# Altium PCB SNES TST Adapter Type B.PcbDoc
Units mm, origin at the board's own origin, x right, y up, seen from the top; angles counter-clockwise.
Board outline 18.8 x 25 mm, 4 copper layers (Top Layer, Signal Layer 1, Signal Layer 2, Bottom Layer), stack 1.62 mm thick; 4 components, 68 nets, 280 pads, 151 vias.
Unrouted connection lines stored in the file: 3.
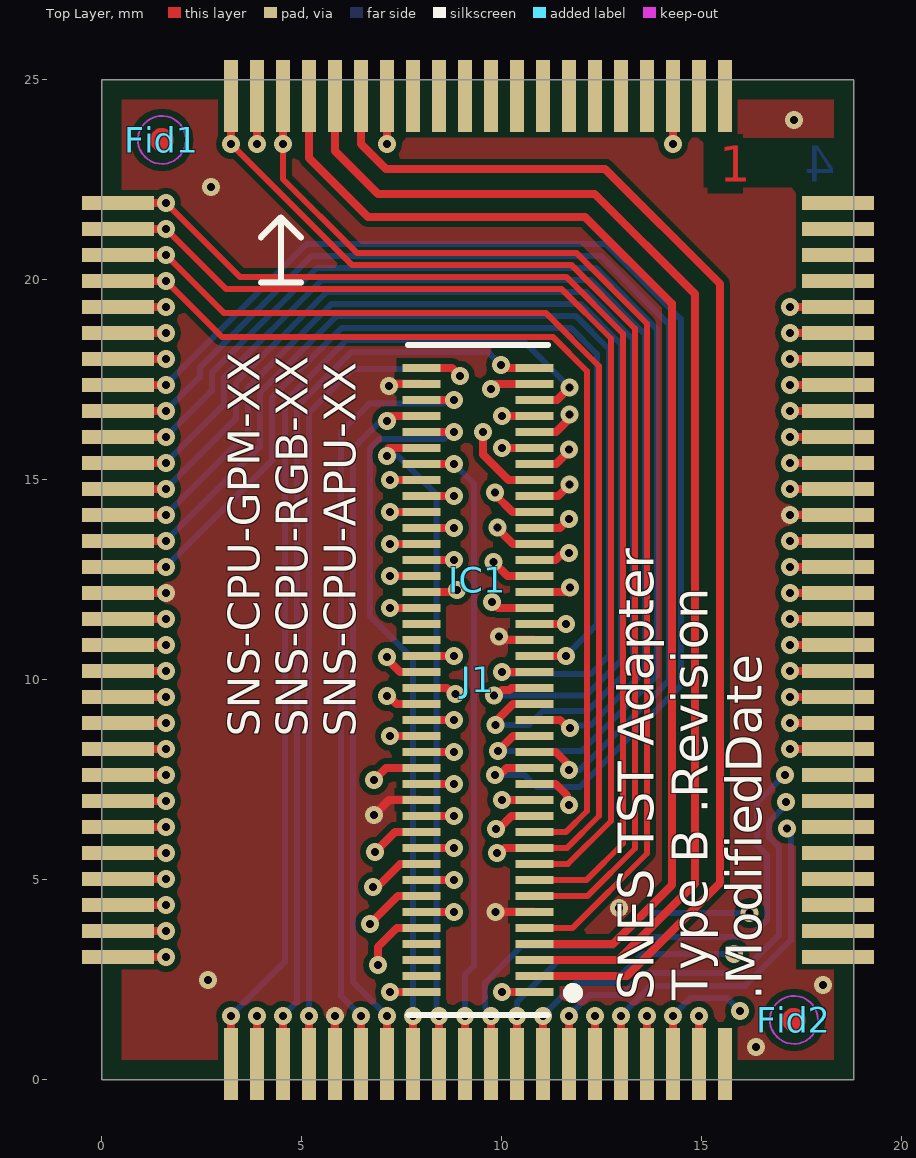
[diagram p0: Top Layer view]
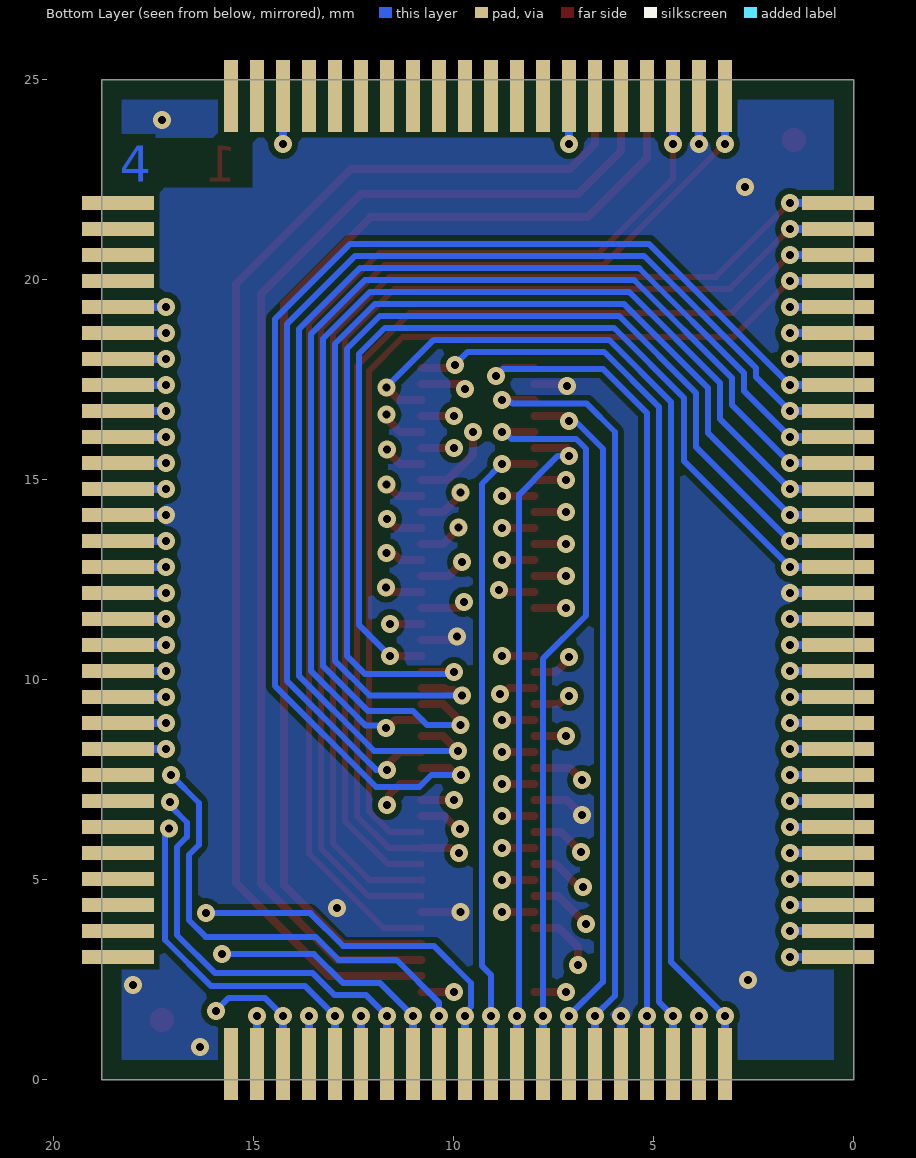
[diagram p1: Bottom Layer view, seen from below]
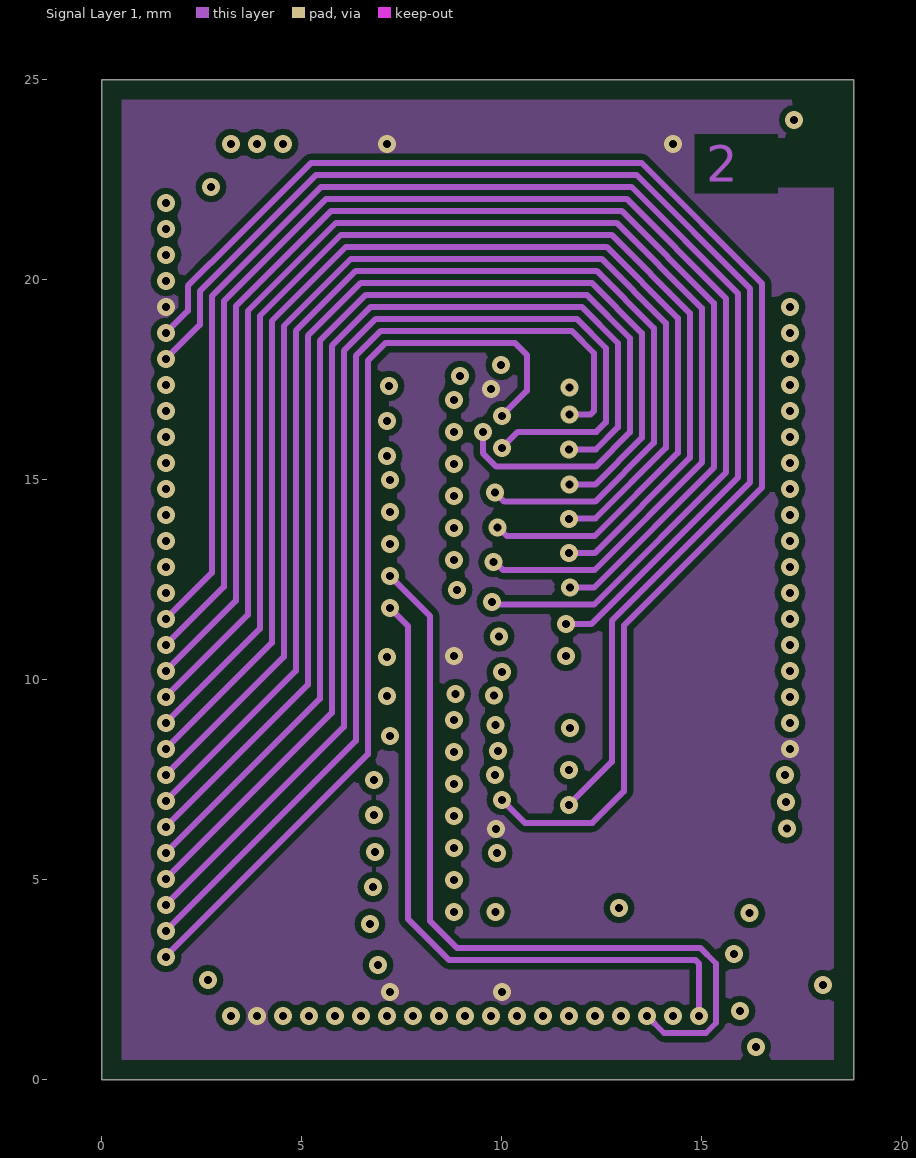
[diagram p2: Signal Layer 1]
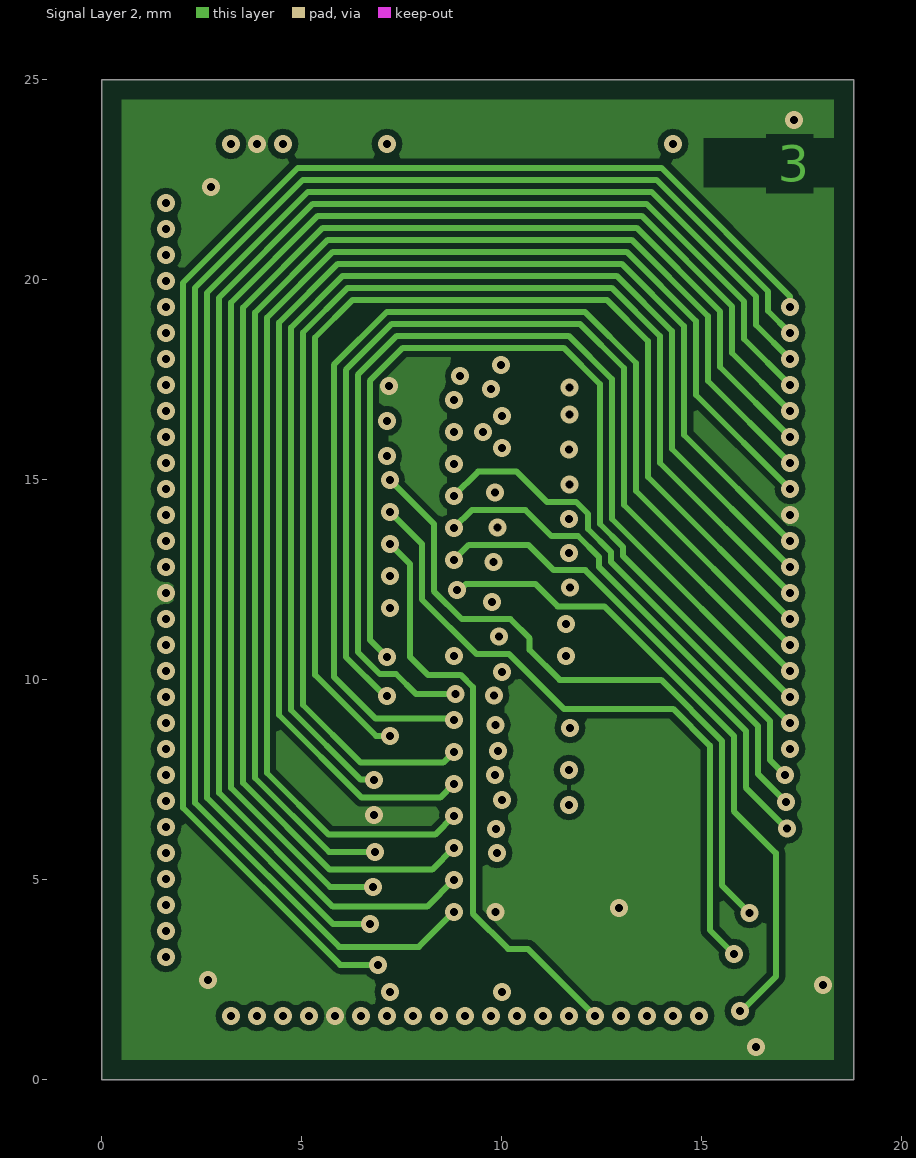
[diagram p3: Signal Layer 2]

## Layer stack, top to bottom
Top Solder: solder mask 0.01, Solder Resist, Dk 3.5
Top Layer: signal copper 0.035
Dielectric 2: prepreg 0.07, 1080, Dk 4.6
Dielectric 4: prepreg 0.07, 1080, Dk 4.6
Signal Layer 1: signal copper 0.035
Dielectric 1: core 1.2, FR-4, Dk 4.8
Signal Layer 2: signal copper 0.035
Dielectric 5: prepreg 0.07, 1080, Dk 4.6
Dielectric 3: prepreg 0.07, 1080, Dk 4.6
Bottom Layer: signal copper 0.035
Bottom Solder: solder mask 0.01, Solder Resist, Dk 3.5

## Board outline
0,0 18.8,0 18.8,25 0,25

## Design rules (kind name [scope] priority, off if disabled: settings)
BoardOutlineClearance [All] p1: gap=0 ignorepadtopadclearanceinfootprint=FALSE except(0.25: Track-OutlineEdge Track-CavityEdge Track-CutoutEdge Track-SplitBarrior; 0.3: Poly-OutlineEdge Poly-CavityEdge Poly-CutoutEdge Poly-SplitBarrior)
Clearance [All] p1: gap=0.15 ignorepadtopadclearanceinfootprint=FALSE except(0: Arc-Hole Track-Hole SMDPad-Hole THPad-Hole Via-Hole Fill-Hole Poly-Hole Region-Hole Text-Hole; 0.127: Arc-Via Track-Via)
MinimumSolderMaskSliver [All] p1: minsoldermaskwidth=0.099
PolygonConnect PolygonConnect_Via [isVia] p1: connectstyle=Direct reliefconductorwidth=0.254 reliefentries=4 polygonreliefangle="90 Angle" airgapwidth=0.254
PolygonConnect [All] p2: connectstyle=Relief reliefconductorwidth=0.2 reliefentries=4 polygonreliefangle="90 Angle" airgapwidth=0.2
RoutingVias [All] p1: holewidth=0.711 width=1.27 viastyle="Through Hole" minholewidth=0.2 minwidth=0.35 maxholewidth=0.711 maxwidth=1.27
SilkToSilkClearance [All] p1: silktosilkclearance=0.1
SilkToSolderMaskClearance [IsPad] p1: minsilkscreentomaskgap=0.1 clearancetoexposedcopper=TRUE
SolderMaskExpansion [All] p1: expansion=0.05 istentingtop=FALSE
UnRoutedNet [Not InNet('5V_S')] p1 off:
Width [All] p1: maxlimit=0.75 minlimit=0.15 preferedwidth=0.2
26 further rules are at their usual default settings.

## Components (designator, comment, footprint, x,y, rotation, side; value= is the part's Value field where it differs from the comment)
Fid1 "Fiducial" Fiducial_1_side 1.5,23.5 r90 top
Fid2 "Fiducial" Fiducial_1_side 17.3,1.5 r270 top
IC1 "PPU2100Pin" PPU100Pin_Double 9.4,12.5 r0 top locked
J1 "DF40C-80DS-0.4V(51)" DF40C-80DS 9.4,10 r90 top locked

## Footprints (in the part's own frame and the unit in brackets; to place one, negate y for a bottom-side part, rotate by r counter-clockwise, add the part's x,y. Pads: shape width x height; smd on the part's side, far side on the other; paste and mask are expansions set on the pad)
DF40C-80DS [mm]
  rect 0.2x0.95 smd: 1(-7.8,-1.415) 2(-7.8,1.415) 3(-7.4,-1.415) 4(-7.4,1.415) 5(-7,-1.415) 6(-7,1.415) 7(-6.6,-1.415) 8(-6.6,1.415) 9(-6.2,-1.415) 10(-6.2,1.415) 11(-5.8,-1.415) 12(-5.8,1.415) 13(-5.4,-1.415) 14(-5.4,1.415) 15(-5,-1.415) 16(-5,1.415) 17(-4.6,-1.415) 18(-4.6,1.415) 19(-4.2,-1.415) 20(-4.2,1.415) 21(-3.8,-1.415) 22(-3.8,1.415) 23(-3.4,-1.415) 24(-3.4,1.415) 25(-3,-1.415) 26(-3,1.415) 27(-2.6,-1.415) 28(-2.6,1.415) 29(-2.2,-1.415) 30(-2.2,1.415) 31(-1.8,-1.415) 32(-1.8,1.415) 33(-1.4,-1.415) 34(-1.4,1.415) 35(-1,-1.415) 36(-1,1.415) 37(-0.6,-1.415) 38(-0.6,1.415) 39(-0.2,-1.415) 40(-0.2,1.415) 41(0.2,-1.415) 42(0.2,1.415) 43(0.6,-1.415) 44(0.6,1.415) 45(1,-1.415) 46(1,1.415) 47(1.4,-1.415) 48(1.4,1.415) 49(1.8,-1.415) 50(1.8,1.415) 51(2.2,-1.415) 52(2.2,1.415) 53(2.6,-1.415) 54(2.6,1.415) 55(3,-1.415) 56(3,1.415) 57(3.4,-1.415) 58(3.4,1.415) 59(3.8,-1.415) 60(3.8,1.415) 61(4.2,-1.415) 62(4.2,1.415) 63(4.6,-1.415) 64(4.6,1.415) 65(5,-1.415) 66(5,1.415) 67(5.4,-1.415) 68(5.4,1.415) 69(5.8,-1.415) 70(5.8,1.415) 71(6.2,-1.415) 72(6.2,1.415) 73(6.6,-1.415) 74(6.6,1.415) 75(7,-1.415) 76(7,1.415) 77(7.4,-1.415) 78(7.4,1.415) 79(7.8,-1.415) 80(7.8,1.415)
  silkscreen extent -8.37,-2.5 8.37,1.75, body extent -9.3,-1.69 9.3,1.69, height 1.4
Fiducial_1_side [mm]
  Top Layer circle w0.3: c0,0 r0.15
  Top Layer keep-out circle w0.05: c0,0 r0.6
PPU100Pin_Double [mm]
  rect 1.8x0.35 smd paste-1: 1(-9,9.425) 2(-9,8.775) 3(-9,8.125) 4(-9,7.475) 5(-9,6.825) 6(-9,6.175) 7(-9,5.525) 8(-9,4.875) 9(-9,4.225) 10(-9,3.575) 11(-9,2.925) 12(-9,2.275) 13(-9,1.625) 14(-9,0.975) 15(-9,0.325) 16(-9,-0.325) 17(-9,-0.975) 18(-9,-1.625) 19(-9,-2.275) 20(-9,-2.925) 21(-9,-3.575) 22(-9,-4.225) 23(-9,-4.875) 24(-9,-5.525) 25(-9,-6.175) 26(-9,-6.825) 27(-9,-7.475) 28(-9,-8.125) 29(-9,-8.775) 30(-9,-9.425) 51(9,-9.425) 52(9,-8.775) 53(9,-8.125) 54(9,-7.475) 55(9,-6.825) 56(9,-6.175) 57(9,-5.525) 58(9,-4.875) 59(9,-4.225) 60(9,-3.575) 61(9,-2.925) 62(9,-2.275) 63(9,-1.625) 64(9,-0.975) 65(9,-0.325) 66(9,0.325) 67(9,0.975) 68(9,1.625) 69(9,2.275) 70(9,2.925) 71(9,3.575) 72(9,4.225) 73(9,4.875) 74(9,5.525) 75(9,6.175) 76(9,6.825) 77(9,7.475) 78(9,8.125) 79(9,8.775) 80(9,9.425)
  rect 1.8x0.35 smd far side: 1(-9,9.425) 2(-9,8.775) 3(-9,8.125) 4(-9,7.475) 5(-9,6.825) 6(-9,6.175) 7(-9,5.525) 8(-9,4.875) 9(-9,4.225) 10(-9,3.575) 11(-9,2.925) 12(-9,2.275) 13(-9,1.625) 14(-9,0.975) 15(-9,0.325) 16(-9,-0.325) 17(-9,-0.975) 18(-9,-1.625) 19(-9,-2.275) 20(-9,-2.925) 21(-9,-3.575) 22(-9,-4.225) 23(-9,-4.875) 24(-9,-5.525) 25(-9,-6.175) 26(-9,-6.825) 27(-9,-7.475) 28(-9,-8.125) 29(-9,-8.775) 30(-9,-9.425) 51(9,-9.425) 52(9,-8.775) 53(9,-8.125) 54(9,-7.475) 55(9,-6.825) 56(9,-6.175) 57(9,-5.525) 58(9,-4.875) 59(9,-4.225) 60(9,-3.575) 61(9,-2.925) 62(9,-2.275) 63(9,-1.625) 64(9,-0.975) 65(9,-0.325) 66(9,0.325) 67(9,0.975) 68(9,1.625) 69(9,2.275) 70(9,2.925) 71(9,3.575) 72(9,4.225) 73(9,4.875) 74(9,5.525) 75(9,6.175) 76(9,6.825) 77(9,7.475) 78(9,8.125) 79(9,8.775) 80(9,9.425)
  rect 0.35x1.8 smd paste-1: 31(-6.175,-12.1) 32(-5.525,-12.1) 33(-4.875,-12.1) 34(-4.225,-12.1) 35(-3.575,-12.1) 36(-2.925,-12.1) 37(-2.275,-12.1) 38(-1.625,-12.1) 39(-0.975,-12.1) 40(-0.325,-12.1) 41(0.325,-12.1) 42(0.975,-12.1) 43(1.625,-12.1) 44(2.275,-12.1) 45(2.925,-12.1) 46(3.575,-12.1) 47(4.225,-12.1) 48(4.875,-12.1) 49(5.525,-12.1) 50(6.175,-12.1) 81(6.175,12.1) 82(5.525,12.1) 83(4.875,12.1) 84(4.225,12.1) 85(3.575,12.1) 86(2.925,12.1) 87(2.275,12.1) 88(1.625,12.1) 89(0.975,12.1) 90(0.325,12.1) 91(-0.325,12.1) 92(-0.975,12.1) 93(-1.625,12.1) 94(-2.275,12.1) 95(-2.925,12.1) 96(-3.575,12.1) 97(-4.225,12.1) 98(-4.875,12.1) 99(-5.525,12.1) 100(-6.175,12.1)
  rect 0.35x1.8 smd far side: 31(-6.175,-12.1) 32(-5.525,-12.1) 33(-4.875,-12.1) 34(-4.225,-12.1) 35(-3.575,-12.1) 36(-2.925,-12.1) 37(-2.275,-12.1) 38(-1.625,-12.1) 39(-0.975,-12.1) 40(-0.325,-12.1) 41(0.325,-12.1) 42(0.975,-12.1) 43(1.625,-12.1) 44(2.275,-12.1) 45(2.925,-12.1) 46(3.575,-12.1) 47(4.225,-12.1) 48(4.875,-12.1) 49(5.525,-12.1) 50(6.175,-12.1) 81(6.175,12.1) 82(5.525,12.1) 83(4.875,12.1) 84(4.225,12.1) 85(3.575,12.1) 86(2.925,12.1) 87(2.275,12.1) 88(1.625,12.1) 89(0.975,12.1) 90(0.325,12.1) 91(-0.325,12.1) 92(-0.975,12.1) 93(-1.625,12.1) 94(-2.275,12.1) 95(-2.925,12.1) 96(-3.575,12.1) 97(-4.225,12.1) 98(-4.875,12.1) 99(-5.525,12.1) 100(-6.175,12.1)

## Part data
IC1: "PPU2"
J1: library part "Conn 80P", "80Pole Connector", Manufacturer_Part_Number=DF40C-80DS-0.4V(51), System=Connector, Vendor="Hirose Connector"

## Via types
v1: diameter 0.45, hole 0.2, Top Layer to Bottom Layer, tented both sides, 151 vias

## Nets (pads, with @x,y where several pads share a name; then routed paths per layer and width w, separated by ;. In a path a pad name is that pad's centre, name@x,y a point inside that pad or via, vN(x,y) a via of type N, cw(c..) or ccw(c..) an arc to the next point about the centre after c; other vN are vias at no path point)
3.58M: IC1.3 J1.19 | length 28.6
  Top Layer w0.15: v1(1.6,20.625) 3.05,19.175 11.096,19.175 12.427,17.844 12.427,6.598 11.629,5.8 J1.19
  Top Layer w0.2: IC1.3@0.4,20.625 v1(1.6,20.625) ; v1(9.875,5.675) 9.943,5.675 10.068,5.8 J1.19
  Bottom Layer w0.2: IC1.3@0.4,20.625 v1(1.6,20.625)
5MIN: IC1.38 J1.72 | length 20.1
  Top Layer w0.2: IC1.38@7.775,0.4 v1(7.775,1.6) ; J1.72 v1(8.8,16.2)
  Bottom Layer w0.15: v1(7.775,1.6) 7.775,10.529 6.698,11.606 6.698,15.777 6.948,16.027 8.562,16.027 8.735,16.2 v1(8.8,16.2)
  Bottom Layer w0.2: IC1.38@7.775,0.4 v1(7.775,1.6)
5MOUT: IC1.27 J1.67 | length 29.9
  Top Layer w0.2: IC1.27@0.4,5.025 v1(1.6,5.025) ; J1.67 11.35,15.4 v1@11.675,15.725
  Signal Layer 1 w0.15: v1(1.6,5.025) 5.75,9.175 5.75,18.352 6.723,19.325 11.998,19.325 12.9,18.423 12.9,16.315 12.346,15.761 v1(11.673,15.761)
  Bottom Layer w0.2: IC1.27@0.4,5.025 v1(1.6,5.025)
5V: IC1.5 IC1.32 IC1.59 IC1.83 IC1.94 J1.1 J1.2 J1.23 J1.44 J1.77 | length 16.7
  Top Layer w0.2: IC1.5@0.4,19.325 v1(1.6,19.325) ; IC1.32@3.875,0.4 v1(3.875,1.6) ; v1(7.125,23.4) IC1.94@7.125,24.6 ; v1@7.17,2.2 v1(7.2,2.2) J1.2 ; J1.44 v1(8.8,10.6) ; v1(9.725,17.275) 9.85,17.4 J1.77 ; v1(9.85,6.275) 9.918,6.275 10.243,6.6 J1.23 ; v1(10,2.2) J1.1 ; v1(14.275,23.4) IC1.83@14.275,24.6 ; v1(17.2,8.275) IC1.59@18.4,8.275
  Bottom Layer w0.2: IC1.5@0.4,19.325 v1(1.6,19.325) ; IC1.32@3.875,0.4 v1(3.875,1.6) ; v1(7.125,23.4) IC1.94@7.125,24.6 ; v1(14.275,23.4) IC1.83@14.275,24.6 ; v1(17.2,8.275) IC1.59@18.4,8.275
B: IC1.97 J1.7 | length 30.7
  Top Layer w0.2: IC1.97@5.175,24.6 5.175,23.05 6.65,21.575 12.081,21.575 14.25,19.406 14.25,4.875 12.775,3.4 11.6,3.4 ; J1.7 11.63,3.4
BURST: IC1.1 J1.15 | length 30.5
  Top Layer w0.15: v1(1.6,21.925) 3.45,20.075 11.611,20.075 13.027,18.659 13.027,5.91 12.117,5 J1.15
  Top Layer w0.2: IC1.1@0.4,21.925 v1(1.6,21.925)
  Bottom Layer w0.2: IC1.1@0.4,21.925 v1(1.6,21.925)
CHR0: IC1.46 J1.56 | length 23.3
  Top Layer w0.2: J1.56 v1(8.8,13) ; IC1.46@12.975,0.4 v1(12.975,1.6)
  Signal Layer 2 w0.15: v1(8.8,13) 9.175,13.375 10.659,13.375 11.291,12.743 12.084,12.743 16.1,8.727 16.1,7.526 16.1,7.309 v1(17.125,6.284)
  Bottom Layer w0.15: v1(12.975,1.6) 13.725,2.35 16.075,2.35 17.222,3.497 17.222,6.187 v1(17.125,6.284)
  Bottom Layer w0.2: IC1.46@12.975,0.4 v1(12.975,1.6)
CHR1: IC1.47 J1.54 | length 23.3
  Top Layer w0.2: v1@7.17,12.6 v1(7.2,12.6) J1.54 ; IC1.47@13.625,0.4 v1(13.625,1.6)
  Signal Layer 1 w0.15: v1(7.2,12.6) 8.2,11.6 8.2,3.975 8.875,3.3 14.961,3.3 15.352,2.909 15.352,1.423 15.102,1.173 14.052,1.173 v1(13.625,1.6)
  Bottom Layer w0.2: IC1.47@13.625,0.4 v1(13.625,1.6)
CHR2: IC1.48 J1.52 | length 21.6
  Top Layer w0.2: J1.52 8.825,12.2 v1(8.875,12.25) ; IC1.48@14.275,0.4 v1(14.275,1.6)
  Signal Layer 2 w0.15: v1(8.875,12.25) 8.956,12.25 9.106,12.4 10.834,12.4 11.394,11.84 12.563,11.84 15.8,8.603 15.8,6.721 16.85,5.671 16.85,2.581 15.994,1.725 v1(15.95,1.725)
  Bottom Layer w0.15: v1(14.275,1.6) 14.725,2.05 15.625,2.05 v1(15.95,1.725)
  Bottom Layer w0.2: IC1.48@14.275,0.4 v1(14.275,1.6)
CHR3: IC1.49 J1.50 | length 20.2
  Top Layer w0.2: v1@7.17,11.8 J1.50 ; IC1.49@14.925,0.4 v1(14.925,1.6)
  Signal Layer 1 w0.15: v1(7.2,11.8) 7.655,11.345 7.655,4.02 8.675,3 14.837,3 14.925,2.912 v1(14.925,1.6)
  Bottom Layer w0.2: IC1.49@14.925,0.4 v1(14.925,1.6)
COLOR0: IC1.41 J1.66 | length 28.2
  Top Layer w0.2: v1@7.17,15 J1.66 ; IC1.41@9.725,0.4 v1(9.725,1.6)
  Signal Layer 2 w0.15: v1(7.2,15) 8.3,13.9 8.3,12.221 8.998,11.523 10.21,11.523 10.693,11.04 10.693,10.749 11.442,10 13.979,10 15.5,8.479 15.5,4.865 v1(16.195,4.17)
  Bottom Layer w0.15: v1(9.725,1.6) 9.725,1.681 9.573,1.833 9.573,2.423 10.5,3.35 12.772,3.35 13.591,4.17 v1(16.195,4.17)
  Bottom Layer w0.2: IC1.41@9.725,0.4 v1(9.725,1.6)
COLOR1: IC1.42 J1.64 | length 27.3
  Top Layer w0.2: J1.64 v1(8.8,14.6) ; IC1.42@10.375,0.4 v1(10.375,1.6)
  Signal Layer 2 w0.15: v1(8.8,14.6) 9.408,15.208 10.367,15.208 11.123,14.452 11.852,14.452 12.153,14.151 12.153,13.772 12.725,13.2 12.725,12.951 16.7,8.976 16.7,8 v1(17.075,7.625)
  Bottom Layer w0.15: v1(10.375,1.6) 10.375,1.941 11.434,3 12.886,3 13.461,3.575 16.204,3.575 16.622,3.993 16.622,5.628 16.373,5.877 16.373,6.923 v1(17.075,7.625)
  Bottom Layer w0.2: IC1.42@10.375,0.4 v1(10.375,1.6)
COLOR2: IC1.43 J1.62 | length 25.3
  Top Layer w0.2: v1@7.17,14.2 v1(7.2,14.2) J1.62 ; IC1.43@11.025,0.4 v1(11.025,1.6)
  Signal Layer 2 w0.15: v1(7.2,14.2) 8,13.4 8,12.01 9.36,10.65 10.175,10.65 11.55,9.275 14.279,9.275 15.2,8.354 15.2,3.748 v1(15.8,3.148)
  Bottom Layer w0.15: v1(11.025,1.6) 11.85,2.425 12.778,2.425 13.501,3.148 v1(15.8,3.148)
  Bottom Layer w0.2: IC1.43@11.025,0.4 v1(11.025,1.6)
CSYNC: IC1.100 J1.13 | length 30.4
  Top Layer w0.15: v1(3.225,23.4) 6.25,20.375 11.735,20.375 13.327,18.783 13.327,5.786 12.141,4.6 J1.13
  Top Layer w0.2: v1(3.225,23.4) IC1.100@3.225,24.6
  Bottom Layer w0.2: v1(3.225,23.4) IC1.100@3.225,24.6
D0: IC1.15 J1.43 | length 25.5
  Top Layer w0.2: IC1.15@0.4,12.825 v1(1.6,12.825) ; J1.43 v1@11.63,10.6
  Bottom Layer w0.15: v1(1.6,12.825) 4.25,15.475 4.25,17.051 5.974,18.775 5.975,18.775 6,18.8 11.724,18.8 12.375,18.149 12.375,11.375 v1(11.6,10.6)
  Bottom Layer w0.2: IC1.15@0.4,12.825 v1(1.6,12.825)
D1: IC1.14 J1.41 | length 28.3
  Top Layer w0.2: IC1.14@0.4,13.475 v1(1.6,13.475) ; v1(10,10.2) J1.41
  Bottom Layer w0.15: v1(1.6,13.475) 3.95,15.825 3.95,17.176 5.849,19.075 5.851,19.075 5.876,19.1 11.849,19.1 12.675,18.274 12.675,10.6 12.218,10.143 10.057,10.143 v1(10,10.2)
  Bottom Layer w0.2: IC1.14@0.4,13.475 v1(1.6,13.475)
D2: IC1.13 J1.39 | length 29.6
  Top Layer w0.2: IC1.13@0.4,14.125 v1(1.6,14.125) ; v1(9.803,9.613) 9.871,9.613 10.006,9.748 10.187,9.748 10.239,9.8 J1.39
  Bottom Layer w0.15: v1(1.6,14.125) 3.65,16.175 3.65,17.3 5.75,19.4 11.973,19.4 12.975,18.398 12.975,10.476 12.112,9.613 v1(9.803,9.613)
  Bottom Layer w0.2: IC1.13@0.4,14.125 v1(1.6,14.125)
D3: IC1.12 J1.37 | length 30.5
  Top Layer w0.2: IC1.12@0.4,14.775 v1(1.6,14.775) ; v1@9.875,9 10.275,9.4 J1.37
  Bottom Layer w0.15: v1(1.6,14.775) 3.35,16.525 3.35,17.428 5.596,19.674 5.6,19.674 5.626,19.7 12.097,19.7 13.275,18.522 13.275,10.351 12.151,9.227 11.027,9.227 10.678,8.878 v1(9.834,8.878)
  Bottom Layer w0.2: IC1.12@0.4,14.775 v1(1.6,14.775)
D4: IC1.11 J1.35 | length 29.1
  Top Layer w0.2: IC1.11@0.4,15.425 v1(1.6,15.425) ; J1.35 11.458,9 11.658,8.8 v1(11.7,8.8)
  Bottom Layer w0.15: v1(1.6,15.425) 3.05,16.875 3.05,17.552 5.472,19.974 5.476,19.974 5.501,20 12.221,20 13.575,18.646 13.575,10.227 12.621,9.273 12.205,8.857 11.757,8.857 v1(11.7,8.8)
  Bottom Layer w0.2: IC1.11@0.4,15.425 v1(1.6,15.425)
D5: IC1.10 J1.33 | length 31.8
  Top Layer w0.2: IC1.10@0.4,16.075 v1(1.6,16.075) ; v1(9.9,8.225) 10.275,8.6 J1.33
  Bottom Layer w0.15: v1(1.6,16.075) 2.75,17.225 2.75,17.676 5.348,20.274 5.352,20.274 5.377,20.3 12.346,20.3 13.875,18.771 13.875,10.103 12.145,8.373 11.997,8.225 v1(9.9,8.225)
  Bottom Layer w0.2: IC1.10@0.4,16.075 v1(1.6,16.075)
D6: IC1.9 J1.31 | length 30.8
  Top Layer w0.2: IC1.9@0.4,16.725 v1(1.6,16.725) ; J1.31 11.344,8.2 11.627,7.916 v1@11.627,7.798
  Bottom Layer w0.15: v1(1.6,16.725) 2.45,17.575 2.45,17.801 5.224,20.575 5.228,20.575 5.253,20.6 12.47,20.6 14.175,18.895 14.175,9.979 12.269,8.073 11.946,7.75 v1(11.675,7.75)
  Bottom Layer w0.2: IC1.9@0.4,16.725 v1(1.6,16.725)
D7: IC1.8 J1.29 | length 33.5
  Top Layer w0.2: IC1.8@0.4,17.375 v1(1.6,17.375) ; v1@9.865,7.625 9.939,7.625 10.114,7.8 J1.29
  Bottom Layer w0.15: v1(1.6,17.375) 5.1,20.875 5.104,20.875 5.129,20.9 12.594,20.9 14.475,19.019 14.475,9.854 11.943,7.323 11.672,7.323 10.863,7.323 10.561,7.625 v1(9.825,7.625)
  Bottom Layer w0.2: IC1.8@0.4,17.375 v1(1.6,17.375)
EXTLATCH: IC1.29 J1.71 | length 28.3
  Top Layer w0.2: IC1.29@0.4,3.725 v1(1.6,3.725) ; J1.71 11.35,16.2 v1@11.7,16.55
  Signal Layer 1 w0.15: v1(1.6,3.725) 6.35,8.475 6.35,18.104 6.971,18.725 11.749,18.725 12.3,18.174 12.3,16.718 12.212,16.63 v1(11.69,16.63)
  Bottom Layer w0.2: IC1.29@0.4,3.725 v1(1.6,3.725)
FIELD: IC1.36 J1.76 | length 21.2
  Top Layer w0.2: IC1.36@6.475,0.4 v1(6.475,1.6) ; J1.76 v1(8.8,17)
  Bottom Layer w0.15: v1(6.475,1.6) 5.973,2.102 5.973,16.198 6.679,16.904 8.542,16.904 8.58,16.943 8.743,16.943 v1(8.8,17)
  Bottom Layer w0.2: IC1.36@6.475,0.4 v1(6.475,1.6)
G: IC1.96 J1.5 | length 31.4
  Top Layer w0.2: IC1.96@5.825,24.6 5.825,23.225 6.899,22.152 12.32,22.152 14.825,19.646 14.825,4.91 12.915,3 J1.5
GND: IC1.16 IC1.35 IC1.68 IC1.99 J1.11 J1.26 J1.45 J1.78 | length 13.6
  Top Layer w0.2: IC1.16@0.4,12.175 v1(1.6,12.175) ; v1(3.875,23.4) IC1.99@3.875,24.6 ; IC1.35@5.825,0.4 v1(5.825,1.6) ; v1(6.8,6.625) 7.175,7 J1.26 ; v1@7.2,17.4 J1.78 ; v1(9.834,4.2) J1.11 ; v1(9.924,11.088) 9.992,11.088 10.08,11 J1.45 ; v1(17.2,14.125) IC1.68@18.4,14.125
  Bottom Layer w0.2: IC1.16@0.4,12.175 v1(1.6,12.175) ; v1(3.875,23.4) IC1.99@3.875,24.6 ; IC1.35@5.825,0.4 v1(5.825,1.6) ; v1(17.2,14.125) IC1.68@18.4,14.125
  other v1: 16.35,0.825 18.025,2.375 2.65,2.5 12.925,4.3 7.175,17.35 2.725,22.325 17.3,24
HBLANK: IC1.25 J1.63 | length 31.5
  Top Layer w0.2: IC1.25@0.4,6.325 v1(1.6,6.325) ; J1.63 11.406,14.6 v1(11.69,14.884)
  Signal Layer 1 w0.15: v1(1.6,6.325) 5.15,9.875 5.15,18.601 6.474,19.925 12.246,19.925 13.5,18.671 13.5,16.051 12.333,14.884 v1(11.69,14.884)
  Bottom Layer w0.2: IC1.25@0.4,6.325 v1(1.6,6.325)
HCLD: IC1.39 J1.70 | length 17.9
  Top Layer w0.2: v1@7.17,15.8 J1.70 ; IC1.39@8.425,0.4 v1(8.425,1.6)
  Bottom Layer w0.15: v1(7.125,15.6) 7.4,15.6 7.6,15.4 8.368,14.632 8.368,1.657 v1(8.425,1.6)
  Bottom Layer w0.2: IC1.39@8.425,0.4 v1(8.425,1.6)
HVC: IC1.98 J1.9 | length 30.7
  Top Layer w0.15: v1(4.525,23.4) 4.525,22.524 6.374,20.675 11.859,20.675 13.627,18.907 13.627,5.661 11.76,3.794 10.821,3.794 J1.9
  Top Layer w0.2: v1(4.525,23.4) IC1.98@4.525,24.6
  Bottom Layer w0.2: v1(4.525,23.4) IC1.98@4.525,24.6
OVER1: IC1.37 J1.74 | length 18.9
  Top Layer w0.2: IC1.37@7.125,0.4 v1(7.125,1.6) ; v1@7.17,16.6 J1.74
  Bottom Layer w0.15: v1(7.125,1.6) 6.273,2.452 6.273,15.776 6.972,16.475 v1(7.125,16.475)
  Bottom Layer w0.2: IC1.37@7.125,0.4 v1(7.125,1.6)
PA0: IC1.24 J1.61 | length 34.4
  Top Layer w0.2: IC1.24@0.4,6.975 v1(1.6,6.975) ; v1(9.831,14.687) 9.831,14.631 10.263,14.2 J1.61
  Signal Layer 1 w0.15: v1(1.6,6.975) 4.85,10.225 4.85,18.725 6.35,20.225 12.371,20.225 13.8,18.796 13.8,15.926 12.33,14.457 10.062,14.457 v1(9.831,14.687)
  Bottom Layer w0.2: IC1.24@0.4,6.975 v1(1.6,6.975)
PA1: IC1.23 J1.59 | length 33
  Top Layer w0.2: IC1.23@0.4,7.625 v1(1.6,7.625) ; J1.59 11.45,13.8 v1(11.675,14.025)
  Signal Layer 1 w0.15: v1(1.6,7.625) 4.55,10.575 4.55,18.849 6.226,20.525 12.495,20.525 14.1,18.92 14.1,15.802 12.334,14.036 11.862,14.036 11.851,14.025 v1(11.675,14.025)
  Bottom Layer w0.2: IC1.23@0.4,7.625 v1(1.6,7.625)
PA2: IC1.22 J1.57 | length 35.8
  Top Layer w0.2: IC1.22@0.4,8.275 v1(1.6,8.275) ; v1@9.875,13.8 10.275,13.4 J1.57
  Signal Layer 1 w0.15: v1(1.6,8.275) 4.25,10.925 4.25,18.974 6.101,20.825 12.619,20.825 14.4,19.044 14.4,15.678 12.32,13.598 10.125,13.598 9.914,13.809 v1(9.887,13.809)
  Bottom Layer w0.2: IC1.22@0.4,8.275 v1(1.6,8.275)
PA3: IC1.21 J1.55 | length 34.5
  Top Layer w0.2: IC1.21@0.4,8.925 v1(1.6,8.925) ; J1.55 11.344,13 11.466,13.122 11.632,13.122 v1(11.68,13.17)
  Signal Layer 1 w0.15: v1(1.6,8.925) 3.95,11.275 3.95,19.098 5.977,21.125 12.743,21.125 14.7,19.168 14.7,15.554 12.316,13.17 v1(11.68,13.17)
  Bottom Layer w0.2: IC1.21@0.4,8.925 v1(1.6,8.925)
PA4: IC1.20 J1.53 | length 37.5
  Top Layer w0.2: IC1.20@0.4,9.575 v1(1.6,9.575) ; v1(9.795,12.944) 10.139,12.6 J1.53
  Signal Layer 1 w0.15: v1(1.6,9.575) 3.65,11.625 3.65,19.222 5.853,21.425 12.868,21.425 15,19.293 15,15.429 12.314,12.743 10.033,12.743 9.832,12.944 v1(9.795,12.944)
  Bottom Layer w0.2: IC1.20@0.4,9.575 v1(1.6,9.575)
PA5: IC1.19 J1.51 | length 36
  Top Layer w0.2: IC1.19@0.4,10.225 v1(1.6,10.225) ; J1.51 11.585,12.2 v1(11.696,12.311)
  Signal Layer 1 w0.15: v1(1.6,10.225) 3.35,11.975 3.35,19.346 5.729,21.725 12.992,21.725 15.3,19.417 15.3,15.305 12.306,12.311 v1(11.696,12.311)
  Bottom Layer w0.2: IC1.19@0.4,10.225 v1(1.6,10.225)
PA6: IC1.18 J1.49 | length 39
  Top Layer w0.2: IC1.18@0.4,10.875 v1(1.6,10.875) ; v1(9.75,11.95) 9.9,11.8 J1.49
  Signal Layer 1 w0.15: v1(1.6,10.875) 3.05,12.325 3.05,19.471 5.604,22.025 13.116,22.025 15.6,19.541 15.6,15.181 12.303,11.884 9.803,11.884 v1@9.727,11.808
  Bottom Layer w0.2: IC1.18@0.4,10.875 v1(1.6,10.875)
PA7: IC1.17 J1.47 | length 37.6
  Top Layer w0.2: IC1.17@0.4,11.525 v1(1.6,11.525) ; J1.47 v1@11.63,11.4
  Signal Layer 1 w0.15: v1(1.6,11.525) 2.75,12.675 2.75,19.595 5.48,22.325 13.24,22.325 15.9,19.665 15.9,15.057 12.243,11.4 v1(11.6,11.4)
  Bottom Layer w0.2: IC1.17@0.4,11.525 v1(1.6,11.525)
PALMODE: IC1.30 J1.73 | length 26.3
  Top Layer w0.2: IC1.30@0.4,3.075 v1(1.6,3.075) ; v1(10,16.6) J1.73
  Signal Layer 1 w0.15: v1(1.6,3.075) 1.6,3.087 6.65,8.137 6.65,17.979 7.096,18.425 10.325,18.425 10.625,18.125 10.625,17.225 v1(10,16.6)
  Bottom Layer w0.2: IC1.30@0.4,3.075 v1(1.6,3.075)
PARD: IC1.7 J1.27 | length 36.6
  Top Layer w0.2: IC1.7@0.4,18.025 v1(1.6,18.025) ; J1.27 11.344,7.4 11.627,7.116 11.627,6.923 v1(11.675,6.875)
  Signal Layer 1 w0.15: v1(1.6,18.025) 2.45,18.875 2.45,19.719 5.356,22.625 13.365,22.625 16.2,19.79 16.2,14.932 12.75,11.482 12.75,7.95 v1(11.675,6.875)
  Bottom Layer w0.2: IC1.7@0.4,18.025 v1(1.6,18.025)
PAWR: IC1.6 J1.25 | length 39.2
  Top Layer w0.2: IC1.6@0.4,18.675 v1(1.6,18.675) ; v1(10,7) J1.25
  Signal Layer 1 w0.15: v1(1.6,18.675) 2.15,19.225 2.15,19.85 2.725,20.425 2.732,20.425 5.232,22.925 13.489,22.925 16.5,19.914 16.5,14.808 13.05,11.358 13.05,7.213 12.262,6.425 10.575,6.425 v1(10,7)
  Bottom Layer w0.2: IC1.6@0.4,18.675 v1(1.6,18.675)
PED: IC1.2 J1.17 | length 29.1
  Top Layer w0.15: v1(1.6,21.275) 3.1,19.775 11.486,19.775 12.727,18.534 12.727,6.474 11.653,5.4 J1.17
  Top Layer w0.2: IC1.2@0.4,21.275 v1(1.6,21.275)
  Bottom Layer w0.2: IC1.2@0.4,21.275 v1(1.6,21.275)
PRIO0: IC1.44 J1.60 | length 25.3
  Top Layer w0.2: J1.60 v1(8.8,13.8) ; IC1.44@11.675,0.4 v1(11.675,1.6)
  Signal Layer 2 w0.15: v1(8.8,13.8) 9.246,14.246 10.588,14.246 11.236,13.598 11.498,13.598 11.902,13.598 12.425,13.075 12.425,12.826 16.4,8.851 16.4,7.65 v1(17.1,6.95)
  Bottom Layer w0.15: v1(11.675,1.6) 12.2,2.125 12.989,2.125 13.534,2.669 15.97,2.669 16.922,3.621 16.922,5.828 16.673,6.077 16.673,6.436 17.1,6.863 v1(17.1,6.95)
  Bottom Layer w0.2: IC1.44@11.675,0.4 v1(11.675,1.6)
PRIO1: IC1.45 J1.58 | length 17.9
  Top Layer w0.2: v1(7.2,13.4) J1.58 ; IC1.45@12.325,0.4 v1(12.325,1.6)
  Signal Layer 2 w0.15: v1(7.2,13.4) 7.7,12.9 7.7,10.575 8.147,10.128 8.969,10.128 9.273,9.823 9.273,4.157 10.155,3.275 10.65,3.275 v1(12.325,1.6)
  Bottom Layer w0.2: IC1.45@12.325,0.4 v1(12.325,1.6)
R: IC1.95 J1.3 | length 32.2
  Top Layer w0.2: IC1.95@6.475,24.6 6.475,23.4 7.098,22.777 12.575,22.777 15.45,19.902 15.45,4.925 13.125,2.6 11.6,2.6 ; J1.3 11.63,2.6
RESET: IC1.34 J1.80 | length 22.8
  Top Layer w0.2: IC1.34@5.175,0.4 v1(5.175,1.6) ; J1.80 8.75,17.8 v1(8.95,17.6)
  Bottom Layer w0.15: v1(5.175,1.6) 5.175,16.676 6.276,17.777 8.773,17.777 v1(8.95,17.6)
  Bottom Layer w0.2: IC1.34@5.175,0.4 v1(5.175,1.6)
RESOUT0: IC1.33 J1.79 | length 24.4
  Top Layer w0.2: IC1.33@4.525,0.4 v1(4.525,1.6) ; v1(9.975,17.875) 10.056,17.875 10.131,17.8 J1.79
  Bottom Layer w0.15: v1(4.525,1.6) 4.875,1.95 4.875,16.826 6.249,18.2 9.65,18.2 v1(9.975,17.875)
  Bottom Layer w0.2: IC1.33@4.525,0.4 v1(4.525,1.6)
RESOUT1: IC1.28 J1.69 | length 30.8
  Top Layer w0.2: IC1.28@0.4,4.375 v1(1.6,4.375) ; v1(10,15.8) J1.69
  Signal Layer 1 w0.15: v1(1.6,4.375) 6.05,8.825 6.05,18.228 6.847,19.025 11.874,19.025 12.6,18.299 12.6,16.439 12.361,16.2 10.4,16.2 v1(10,15.8)
  Bottom Layer w0.2: IC1.28@0.4,4.375 v1(1.6,4.375)
TOUMEI: IC1.4 J1.21 | length 26.4
  Top Layer w0.15: v1(1.6,19.975) 3,18.575 11.272,18.575 12.127,17.72 12.127,6.723 11.604,6.2 J1.21
  Top Layer w0.2: IC1.4@0.4,19.975 v1(1.6,19.975)
  Bottom Layer w0.2: IC1.4@0.4,19.975 v1(1.6,19.975)
VBLANK: IC1.26 J1.65 | length 34.6
  Top Layer w0.2: IC1.26@0.4,5.675 v1(1.6,5.675) ; v1(9.525,16.2) 9.525,15.636 10.161,15 J1.65
  Signal Layer 1 w0.15: v1(1.6,5.675) 5.45,9.525 5.45,18.476 6.599,19.625 12.122,19.625 13.2,18.547 13.2,16.191 12.343,15.334 9.862,15.334 9.525,15.671 v1(9.525,16.2)
  Bottom Layer w0.2: IC1.26@0.4,5.675 v1(1.6,5.675)
VCLD: IC1.40 J1.68 | length 17.3
  Top Layer w0.2: J1.68 v1(8.8,15.4) ; IC1.40@9.075,0.4 v1(9.075,1.6)
  Bottom Layer w0.15: v1(8.8,15.4) 9.302,14.898 9.302,2.852 9.075,2.625 v1(9.075,1.6)
  Bottom Layer w0.2: IC1.40@9.075,0.4 v1(9.075,1.6)
VDA0: IC1.60 J1.42 | length 27.4
  Top Layer w0.2: v1@7.125,10.525 7.45,10.2 J1.42 ; v1(17.2,8.925) IC1.60@18.4,8.925
  Signal Layer 2 w0.15: v1(7.125,10.575) 6.698,11.002 6.698,17.477 7.523,18.302 11.545,18.302 12.453,17.394 12.453,13.897 13.025,13.325 13.025,13.1 v1(17.2,8.925)
  Bottom Layer w0.2: v1(17.2,8.925) IC1.60@18.4,8.925
VDA1: IC1.61 J1.40 | length 30.1
  Top Layer w0.2: J1.40 8.625,9.8 8.775,9.65 v1(8.843,9.65) ; v1(17.2,9.575) IC1.61@18.4,9.575
  Signal Layer 2 w0.15: v1(8.843,9.65) 7.85,9.65 7.352,10.148 6.948,10.148 6.398,10.698 6.398,17.626 7.374,18.602 11.669,18.602 12.753,17.518 12.753,14.022 v1(17.2,9.575)
  Bottom Layer w0.2: v1(17.2,9.575) IC1.61@18.4,9.575
VDA2: IC1.62 J1.38 | length 29.1
  Top Layer w0.2: v1(7.125,9.6) 7.167,9.6 7.367,9.4 J1.38 ; v1(17.2,10.225) IC1.62@18.4,10.225
  Signal Layer 2 w0.15: v1(7.125,9.6) 7.072,9.6 6.098,10.574 6.098,17.75 7.25,18.902 11.95,18.902 13.053,17.799 13.053,14.372 v1(17.2,10.225)
  Bottom Layer w0.2: v1(17.2,10.225) IC1.62@18.4,10.225
VDA3: IC1.63 J1.36 | length 31.7
  Top Layer w0.2: J1.36 v1(8.8,9) ; v1(17.2,10.875) IC1.63@18.4,10.875
  Signal Layer 2 w0.15: v1(8.8,9) 8.761,9.039 6.837,9.039 5.798,10.079 5.798,17.875 7.126,19.202 12.074,19.202 13.353,17.924 13.353,14.722 v1(17.2,10.875)
  Bottom Layer w0.2: v1(17.2,10.875) IC1.63@18.4,10.875
VDA4: IC1.64 J1.34 | length 31.7
  Top Layer w0.2: v1@7.17,8.6 J1.34 ; v1(17.2,11.525) IC1.64@18.4,11.525
  Signal Layer 2 w0.15: v1(7.2,8.6) 6.852,8.6 5.327,10.125 5.327,18.56 6.269,19.502 12.621,19.502 13.653,18.47 13.653,15.072 v1(17.2,11.525)
  Bottom Layer w0.2: v1(17.2,11.525) IC1.64@18.4,11.525
VDA5: IC1.65 J1.32 | length 34.7
  Top Layer w0.2: J1.32 v1(8.8,8.2) ; v1(17.2,12.175) IC1.65@18.4,12.175
  Signal Layer 2 w0.15: v1(8.8,8.2) 8.53,7.93 6.47,7.93 5.027,9.373 5.027,18.684 6.145,19.802 12.746,19.802 13.953,18.595 13.953,15.422 v1(17.2,12.175)
  Bottom Layer w0.2: v1(17.2,12.175) IC1.65@18.4,12.175
VDA6: IC1.66 J1.30 | length 33.8
  Top Layer w0.2: v1(6.8,7.5) 7.1,7.8 J1.30 ; v1(17.2,12.825) IC1.66@18.4,12.825
  Signal Layer 2 w0.15: v1(6.8,7.5) 6.794,7.505 6.469,7.505 4.727,9.247 4.727,18.809 6.021,20.102 12.87,20.102 14.253,18.719 14.253,15.772 v1(17.2,12.825)
  Bottom Layer w0.2: v1(17.2,12.825) IC1.66@18.4,12.825
VDA7: IC1.67 J1.28 | length 36.2
  Top Layer w0.2: J1.28 v1(8.8,7.4) ; v1(17.2,13.475) IC1.67@18.4,13.475
  Signal Layer 2 w0.15: v1(8.8,7.4) 8.456,7.056 6.494,7.056 4.427,9.123 4.427,18.933 5.896,20.402 12.994,20.402 14.553,18.843 14.553,16.122 v1(17.2,13.475)
  Bottom Layer w0.2: v1(17.2,13.475) IC1.67@18.4,13.475
VDB0: IC1.69 J1.24 | length 37.4
  Top Layer w0.2: J1.24 v1(8.8,6.6) ; v1(17.2,14.775) IC1.69@18.4,14.775
  Signal Layer 2 w0.15: v1(8.8,6.6) 8.33,6.13 5.67,6.13 4.127,7.673 4.127,19.057 5.772,20.702 13.118,20.702 14.853,18.968 14.853,17.122 v1(17.2,14.775)
  Bottom Layer w0.2: v1(17.2,14.775) IC1.69@18.4,14.775
VDB1: IC1.70 J1.22 | length 36.6
  Top Layer w0.2: v1(6.825,5.7) 7.325,6.2 J1.22 ; v1(17.2,15.425) IC1.70@18.4,15.425
  Signal Layer 2 w0.15: v1(6.825,5.7) 5.676,5.7 3.827,7.549 3.827,19.181 5.648,21.002 13.243,21.002 15.153,19.092 15.153,17.472 v1(17.2,15.425)
  Bottom Layer w0.2: v1(17.2,15.425) IC1.70@18.4,15.425
VDB2: IC1.71 J1.20 | length 39
  Top Layer w0.2: J1.20 v1(8.8,5.8) ; v1(17.2,16.075) IC1.71@18.4,16.075
  Signal Layer 2 w0.15: v1(8.8,5.8) 8.257,5.257 5.694,5.257 3.527,7.424 3.527,19.306 5.524,21.302 13.367,21.302 15.453,19.216 15.453,17.822 v1(17.2,16.075)
  Bottom Layer w0.2: v1(17.2,16.075) IC1.71@18.4,16.075
VDB3: IC1.72 J1.18 | length 38.1
  Top Layer w0.2: v1(6.778,4.825) 6.881,4.825 7.456,5.4 J1.18 ; v1(17.2,16.725) IC1.72@18.4,16.725
  Signal Layer 2 w0.15: v1(6.778,4.825) 5.702,4.825 3.227,7.3 3.227,19.43 5.399,21.602 13.491,21.602 15.753,19.34 15.753,18.172 v1(17.2,16.725)
  Bottom Layer w0.2: v1(17.2,16.725) IC1.72@18.4,16.725
VDB4: IC1.73 J1.16 | length 40.6
  Top Layer w0.2: J1.16 v1(8.8,5) ; v1(17.2,17.375) IC1.73@18.4,17.375
  Signal Layer 2 w0.15: v1(8.8,5) 8.13,4.33 5.773,4.33 2.927,7.176 2.927,19.554 5.275,21.902 13.615,21.902 16.053,19.465 16.053,18.522 v1(17.2,17.375)
  Bottom Layer w0.2: v1(17.2,17.375) IC1.73@18.4,17.375
VDB5: IC1.74 J1.14 | length 39.7
  Top Layer w0.2: v1(6.7,3.903) 7.397,4.6 J1.14 ; v1(17.2,18.025) IC1.74@18.4,18.025
  Signal Layer 2 w0.15: v1(6.7,3.903) 5.775,3.903 2.627,7.052 2.627,19.678 5.151,22.202 13.74,22.202 16.353,19.589 16.353,18.872 v1(17.2,18.025)
  Bottom Layer w0.2: v1(17.2,18.025) IC1.74@18.4,18.025
VDB6: IC1.75 J1.12 | length 42.3
  Top Layer w0.2: J1.12 v1(8.8,4.2) ; v1(17.2,18.675) IC1.75@18.4,18.675
  Signal Layer 2 w0.15: v1(8.8,4.2) 7.925,3.325 5.929,3.325 2.327,6.927 2.327,19.803 5.027,22.502 13.864,22.502 16.653,19.713 16.653,19.222 v1(17.2,18.675)
  Bottom Layer w0.2: v1(17.2,18.675) IC1.75@18.424,18.675
VDB7: IC1.76 J1.10 | length 41.7
  Top Layer w0.2: v1(6.9,2.875) 6.9,3.329 7.371,3.8 J1.10 ; v1(17.2,19.325) IC1.76@18.4,19.325
  Signal Layer 2 w0.15: v1(6.9,2.875) 5.955,2.875 2.027,6.803 2.027,19.927 4.902,22.802 13.988,22.802 17.2,19.59 v1(17.2,19.325)
  Bottom Layer w0.2: v1(17.2,19.325) IC1.76@18.4,19.325
XIN: IC1.31 J1.75 | length 27.6
  Top Layer w0.2: IC1.31@3.225,0.4 v1(3.225,1.6) ; J1.75 11.375,17 v1(11.69,17.315)
  Bottom Layer w0.15: v1(3.225,1.6) 4.575,2.95 4.575,16.951 6.124,18.5 10.504,18.5 v1(11.69,17.315)
  Bottom Layer w0.2: IC1.31@3.225,0.4 v1(3.225,1.6)
pads on no net: IC1.50 IC1.51 IC1.52 IC1.53 IC1.54 IC1.55 IC1.56 IC1.57 IC1.58 IC1.77 IC1.78 IC1.79 IC1.80 IC1.81 IC1.82 IC1.84 IC1.85 IC1.86 IC1.87 IC1.88 IC1.89 IC1.90 IC1.91 IC1.92 IC1.93 J1.4 J1.6 J1.8 J1.46 J1.48

## Polygon pours and split planes (outlines as drawn)
GND on Bottom Layer "GND BOT" (solid, remove dead copper, pour order 0): 0.5,0.5 18.3,0.5 18.3,24.5 0.5,24.5
GND on Signal Layer 2 "GND Sig2" (solid, remove dead copper, pour order 2): 0.5,0.5 18.3,0.5 18.3,24.5 0.5,24.5
5V on Signal Layer 1 "5V" (solid, remove dead copper, pour order 5): 0.5,0.5 18.3,0.5 18.3,24.5 0.5,24.5
GND on Top Layer "GND TOP" (solid, remove dead copper, pour order 4): 0.5,0.5 18.3,0.5 18.3,24.5 0.5,24.5

## Other copper
Top Layer:
  text "1" at 15.432,22.451 h0.9
Signal Layer 1:
  text "2" at 15.107,22.451 h0.9
Signal Layer 2:
  text "3" at 16.9,22.45 h0.9
Bottom Layer:
  text "4" at 18.35,22.45 h0.9
Multi-Layer:
  pour cut-out: 15.028,22.3 15.028,23.55 18.55,23.55 18.55,22.3

## Silkscreen, mask and mechanical layers (free items; w line width, h text height)
Top Overlay:
  lines w0.15: 3.975,19.937 4.975,19.937 ; 3.975,21.063 4.475,21.562 ; 4.475,19.937 4.475,21.562 ; 4.975,21.063 4.475,21.562
  text "SNS-CPU-GPM-XX / SNS-CPU-RGB-XX / SNS-CPU-APU-XX" at 6.35,8.575 h0.8 r90
  text "SNES TST Adapter / Type B .Revision / .ModifiedDate" at 16.5,1.987 h0.9 r90
Mechanical 3:
  the board outline again, w0.05